# EAGLE board Thetis_RevF3_PCB (EAGLE 9.7.0)
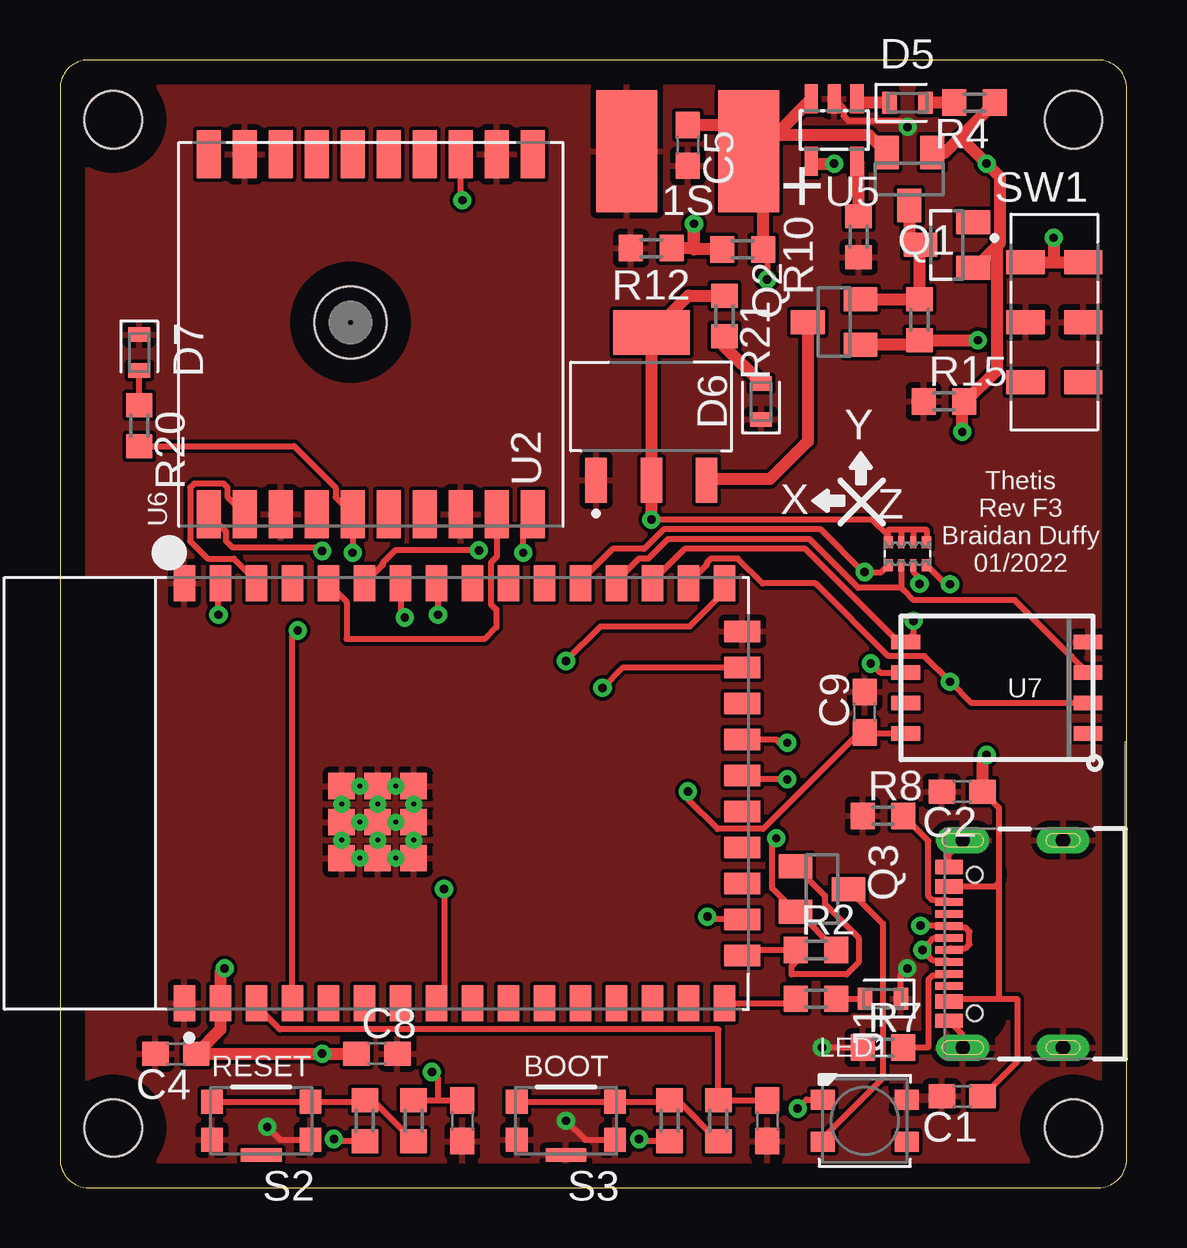
[diagram p0: board, top side]
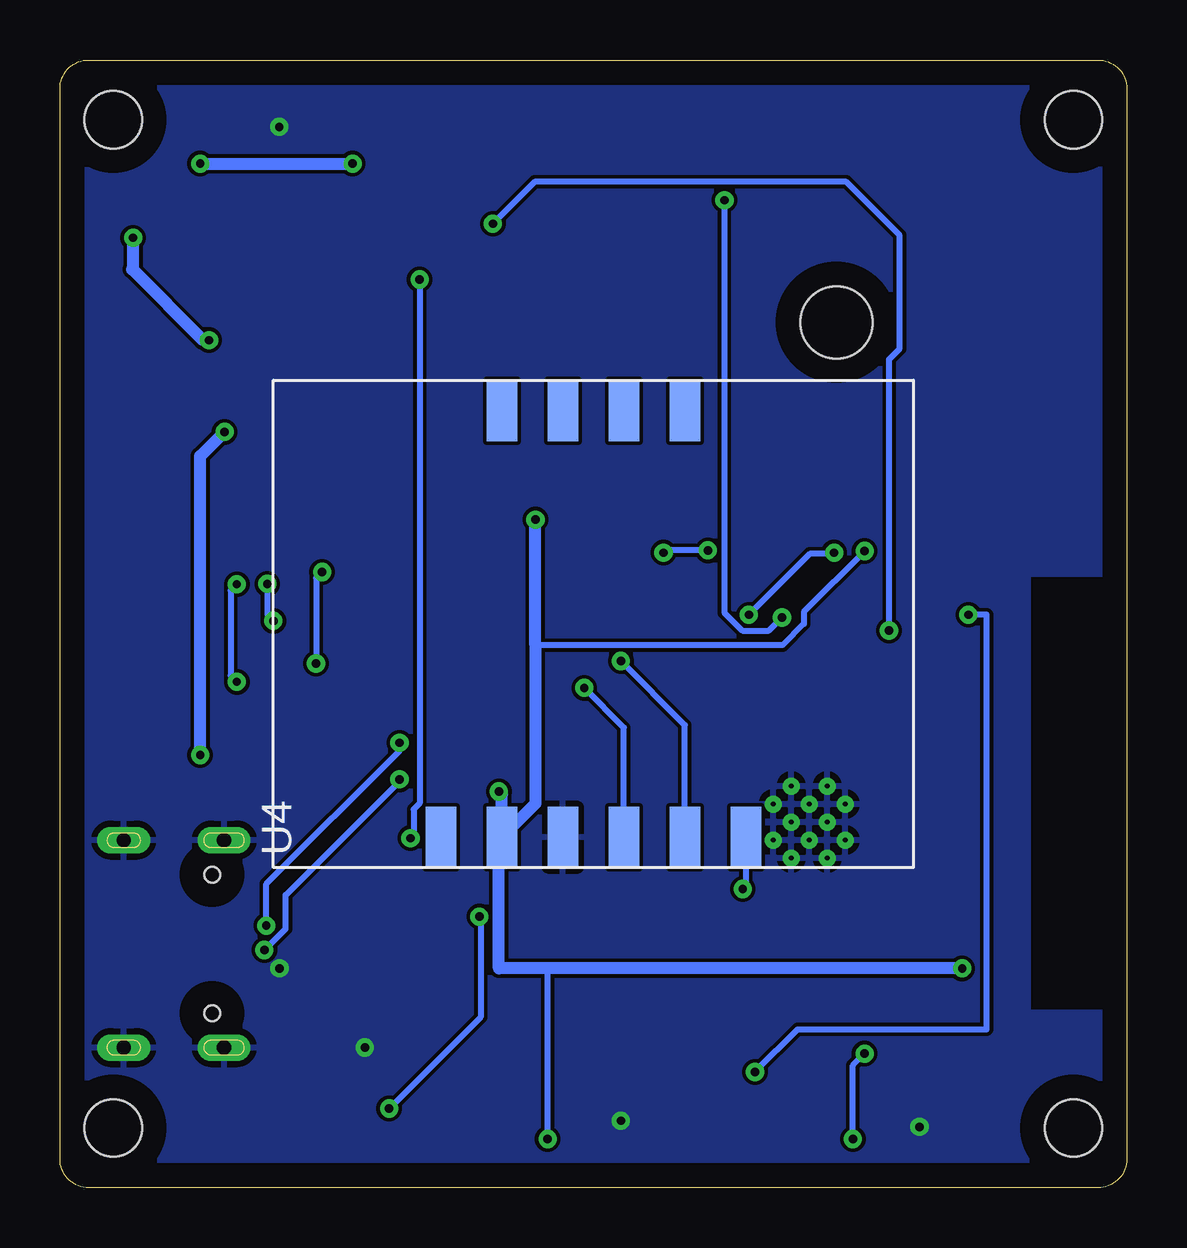
[diagram p1: board, bottom side, seen from below]

Size 44.45 x 46.99 mm. Coordinates in mm from the lower left corner, seen from the top.
Outline: 44.45,1.19 44.45,45.8 arc90 43.26,46.99 1.19,46.99 arc90 0,45.8 0,1.19 arc90 1.19,0 43.26,0 arc90 44.45,1.19
Copper layers (1*16): Top 0.035mm / dielectric 1.5mm / Bottom 0.035mm
Design rules "default": minimum track width 6mil, minimum drill 0.35mm, track to track 6mil, track to pad 6mil, pad to pad 6mil, via to via 6mil, smd to smd 6mil, copper to edge 40mil, drill to drill 6mil, minimum pad ring 10mil, minimum via ring 8mil, stop-mask expansion 4mil, vias tented up to drill 0mil, thermal gap 10mil
Net classes: 0 default: width 0.178 mm; 2 lowpower: width 0.305 mm, drill 0.483 mm
Holes 2.39 mm at 2.22,2.49 2.22,44.5 42.23,44.5 42.23,2.49
tKeepout: area -0.2,42.1 to 4.6,46.9; area 39.8,42.1 to 44.6,46.9; area 39.8,0.1 to 44.6,4.9; area -0.2,0.1 to 4.6,4.9
bKeepout: area 39.8,42.1 to 44.6,46.9; area -0.2,42.1 to 4.6,46.9; area 39.8,0.1 to 44.6,4.9; area -0.2,0.1 to 4.6,4.9

## Footprints (pad centres in the part's own frame; a part is rotated, then mirrored left to right if it is on the bottom)
C0603 = smd 1.1 x 1: 1 -0.85,0; 2 0.85,0
SOT23 = smd 1 x 1.4: 1 -0.95,-1.1; 2 0.95,-1.1; 3 0,1.1
LEDC1608X65N = smd 0.612 x 0.912: A 0.75,0; C -0.75,0
LEDC1608X35N = smd 0.612 x 0.912: A 0.75,0; C -0.75,0
GCT_USB4105-GF-A = smd 0.6 x 1.15: A1_B12 -3.2,4.755; A4_B9 -2.4,4.755; B1_A12 3.2,4.755; B4_A9 2.4,4.755 | smd 0.3 x 1.15: A5 -1.25,4.755; A6 -0.25,4.755; A7 0.25,4.755; A8 1.25,4.755; B5 1.75,4.755; B6 0.75,4.755; B7 -0.75,4.755; B8 -1.75,4.755 | drill 0.6 pad 1.05 long: S1 -4.32,4.18; S4 4.32,4.18 | drill 0.6 pad 1 long: S2 -4.32,0; S3 4.32,0 | hole 0.65: 2.89,3.68; -2.89,3.68
LED3535 = smd 1 x 0.85: 1 -1.75,0.875; 2 -1.75,-0.875; 3 1.75,-0.875; 4 1.75,0.875
SMD2,54-5,08 = smd 2.54 x 5.08: 1 0,0
R0603 = smd 1 x 1.1: 1 -0.85,0; 2 0.85,0
EXBN8V = smd 0.38 x 0.5: 1 -0.8,-0.475; 4 0.8,-0.475; 5 0.8,0.475; 8 -0.8,0.475 | smd 0.25 x 0.5: 2 -0.25,-0.475; 3 0.25,-0.475; 6 0.25,0.475; 7 -0.25,0.475
SW_KMR221GLFS = smd 0.9 x 1: 1 -2.05,0.8; 2 -2.05,-0.8; 3 2.05,-0.8; 4 2.05,0.8 | smd 1.7 x 0.55: 5 0,1.425
SW_JS202011JCQN = smd 1.6 x 1: 1 -1.2,2.5; 2 -1.2,0; 3 -1.2,-2.5; 4 1.2,2.5; 5 1.2,0; 6 1.2,-2.5
SOT230P700X180-4N = smd 1.86 x 0.9: 1 -3.075,2.3; 2 -3.075,0; 3 -3.075,-2.3 | smd 1.86 x 3.19: 4 3.075,0
XCVR_ESP32-S2-WROOM = smd 1.5 x 0.9: 1 -8.75,8; 2 -8.75,6.5; 3 -8.75,5; 4 -8.75,3.5; 5 -8.75,2; 6 -8.75,0.5; 7 -8.75,-1; 8 -8.75,-2.5; 9 -8.75,-4; 10 -8.75,-5.5; 11 -8.75,-7; 12 -8.75,-8.5; 13 -8.75,-10; 14 -8.75,-11.5; 15 -8.75,-13; 16 -8.75,-14.5; 27 8.75,-14.5; 28 8.75,-13; 29 8.75,-11.5; 30 8.75,-10; 31 8.75,-8.5; 32 8.75,-7; 33 8.75,-5.5; 34 8.75,-4; 35 8.75,-2.5; 36 8.75,-1; 37 8.75,0.5; 38 8.75,2; 39 8.75,3.5; 40 8.75,5; 41 8.75,6.5; 42 8.75,8 | smd 0.9 x 1.5: 17 -6.75,-15.25; 18 -5.25,-15.25; 19 -3.75,-15.25; 20 -2.25,-15.25; 21 -0.75,-15.25; 22 0.75,-15.25; 23 2.25,-15.25; 24 3.75,-15.25; 25 5.25,-15.25; 26 6.75,-15.25 | smd 1.1 x 1.1: 43.1 -1.19,-0.05; 43.2 -2.69,-0.05; 43.3 0.31,-0.05; 43.4 -2.69,-1.55; 43.5 -1.19,-1.55; 43.6 0.31,-1.55; 43.7 -2.69,1.45; 43.8 -1.19,1.45; 43.9 0.31,1.45 | drill 0.2 pad 0.4: 43.10 -1.19,0.7; 43.11 -2.69,0.7; 43.12 0.31,0.7; 43.13 -2.69,-0.8; 43.14 -1.19,-0.8; 43.15 0.31,-0.8; 43.16 -1.94,1.45; 43.17 -0.44,1.45; 43.18 -1.94,-0.05; 43.19 -0.44,-0.05; 43.20 -1.94,-1.55; 43.21 -0.44,-1.55
ADAFRUIT-BNO055-BREAKOUT-SMD = smd 2.54 x 1.27: P$1 -8.89,6.35; P$2 -8.89,3.81; P$3 -8.89,1.27; P$4 -8.89,-1.27; P$5 -8.89,-3.81; P$6 -8.89,-6.35; P$7 8.89,3.81; P$8 8.89,1.27; P$9 8.89,-1.27; P$10 8.89,-3.81
SOT23-5L = smd 0.55 x 1.2: 1 -0.95,-1.3; 2 0,-1.3; 3 0.95,-1.3; 4 0.95,1.3; 5 -0.95,1.3
FGPMMOPA6H = smd 2 x 1: P$1 -7.5,6.75; P$2 -7.5,5.25; P$3 -7.5,3.75; P$4 -7.5,2.25; P$5 -7.5,0.75; P$6 -7.5,-0.75; P$7 -7.5,-2.25; P$8 -7.5,-3.75; P$9 -7.5,-5.25; P$10 -7.5,-6.75; P$11 7.5,-6.75; P$12 7.5,-5.25; P$13 7.5,-3.75; P$14 7.5,-2.25; P$15 7.5,-0.75; P$16 7.5,0.75; P$17 7.5,2.25; P$18 7.5,3.75; P$19 7.5,5.25; P$20 7.5,6.75 | hole 3: 0.5,0.85
LGA8_8X6 = smd 1.2 x 0.6: 1 -3.8,1.905; 2 -3.8,0.635; 3 -3.8,-0.635; 4 -3.8,-1.905; 5 3.8,-1.905; 6 3.8,-0.635; 7 3.8,0.635; 8 3.8,1.905

## Placement (x,y rotation side)
C1  10 uF  [C0603]  37.59,3.81 180 top
C2  10 uF  [C0603]  37.59,16.51 180 top
C3  1 uF  [C0603]  16.76,2.79 270 top
C4  1 uF  [C0603]  4.83,5.59 180 top
C5  10 uF  [C0603]  26.16,43.43 270 top
C6  1 uF  [C0603]  29.46,2.79 270 top
C8  1 uF  [C0603]  13.21,5.59 0 top
C9  1 uF  [C0603]  33.53,19.81 90 top
D4  BAT400  [SOT23]  36.95,39.28 90 top
D5  ORG  [LEDC1608X65N]  35.31,45.21 0 top
D6  RED  [LEDC1608X65N]  29.21,32.77 90 top
D7  RED  [LEDC1608X35N]  3.3,34.8 270 top
D8  BLU  [LEDC1608X65N]  34.29,7.87 180 top
J1  USB4105-GF-A  [GCT_USB4105-GF-A]  41.79,10.16 90 top
LED1  WS2812B3535  [LED3535]  33.53,2.79 0 top
PAD1  Batt+  [SMD2,54-5,08]  28.7,43.18 0 top
PAD2  Batt-  [SMD2,54-5,08]  23.62,43.18 0 top
Q1  DMG3415U-7  [SOT23]  35.39,42.03 180 top
Q2  DMG3415U-7  [SOT23]  32.26,36.07 90 top
Q3  DMG3415U-7  [SOT23]  31.75,12.45 270 top
R1  10k  [R0603]  25.4,2.79 270 top
R2  1k  [R0603]  31.5,9.91 0 top
R3  10k  [R0603]  27.43,2.79 90 top
R4  1k  [R0603]  38.1,45.21 180 top
R5  2k  [R0603]  33.27,39.62 270 top
R6  10k  [R0603]  14.73,2.79 90 top
R7  5k4  [R0603]  34.29,5.84 0 top
R8  5k4  [R0603]  34.29,15.49 0 top
R10  1M  [R0603]  28.45,39.1 0 top
R12  1M  [R0603]  24.64,39.15 0 top
R13  10k  [R0603]  12.7,2.79 270 top
R14  1k  [R0603]  31.5,7.87 0 top
R15  100k  [R0603]  36.83,32.77 0 top
R16  100k  [R0603]  35.81,36.16 90 top
R20  1k  [R0603]  3.3,31.75 270 top
R21  1k  [R0603]  27.69,36.32 270 top
RN1  10k  [EXBN8V]  35.31,26.42 180 top
S2  KMR221GLFS  [SW_KMR221GLFS]  8.38,2.79 180 top
S3  KMR221GLFS  [SW_KMR221GLFS]  21.08,2.79 180 top
SW1  JS202011JCQN  [SW_JS202011JCQN]  41.43,36.07 0 top
U2  AZ1117H-3.3TRE1  [SOT230P700X180-4N]  24.64,32.55 90 top
U3  ESP32-S2-WROOM  [XCVR_ESP32-S2-WROOM]  13.18,16.43 90 top
U4  BNO055 Breakout  [ADAFRUIT-BNO055-BREAKOUT-SMD]  22.23,23.5 90 bottom
U5  MCP73831/OT  [SOT23-5L]  32.26,44.07 180 top
U6  [FGPMMOPA6H]  12.95,35.56 90 top
U7  XTSD  [LGA8_8X6]  39.03,20.83 180 top

## Library data of the parts
C1-C6 C8 C9 = rcl; SPICEPREFIX: C
D4 = diode
D5 D6 D8 = LED; CATEGORY: LED; COLOR: GREEN; DESCRIPTION: CHIP LED ROUND; SUB-CATEGORY: CHIP; TYPE: ROUND_TOP
D7 = LED; CATEGORY: LED; COLOR: YELLOW; DESCRIPTION: CHIP LED FLAT; SUB-CATEGORY: CHIP; TYPE: FLAT_TOP
J1 = USB4105-GF-A; AVAILABILITY: In Stock; DESCRIPTION: USB-C (USB TYPE-C) USB 2.0 Receptacle Connector 24 (16+8 Dummy) Position Surface Mount, Right Angle; Through Hole; MF: GCT; MP: USB4105-GF-A; PACKAGE: None; PRICE: None; PURCHASE-URL: https://pricing.snapeda.com/search/part/USB4105-GF-A/?ref=eda
LED1 = adafruit
PAD1 PAD2 = wirepad
Q1-Q3 = Transistor; CATEGORY: Transistor; DESCRIPTION: MOSFET P-CH 50V 130MA SOT-23; DRAIN_CURRENT: 130mA; MANUFACTURER: ON Semiconductor; MPN: BSS84; OPERATING_TEMP: -55°C ~ 150°C; PART_STATUS: Active; ROHS_COMPLIANT: Yes; SUB-CATEGORY: MOSFET; THERMALLOSS: 360mW; TYPE: P-Channel
R1-R8 R10 R12-R16 R20 R21 = rcl; SPICEPREFIX: R
RN1 = resistor-dil-Poseidon-Edit; OC_FARNELL: unknown; OC_NEWARK: unknown
S2 S3 = KMR221GLFS; MANUFACTURER: CnK
SW1 = UTL-Lib
U2 = AZ1117EH-5.0TRG1; ARROW_ELECTRONICS-PURCHASE-URL: https://snapeda.com/shop?store=Arrow+Electronics&id=482930; AVAILABILITY: Good; DESCRIPTION: Linear Voltage Regulator IC 1 Output 1A SOT-223; DIGIKEY-PURCHASE-URL: https://snapeda.com/shop?store=DigiKey&id=482930; MF: Diodes Inc.; MOUSER-PURCHASE-URL: https://snapeda.com/shop?store=Mouser&id=482930; MP: AZ1117EH-5.0TRG1; PACKAGE: SOT-223 Diodes Inc.; PRICE: None
U3 = ESP32-S2-WROOM; MANUFACTURER: Espressif Systems; MAXIMUM_PACKAGE_HEIGHT: 3.45mm; PARTREV: V1.0; STANDARD: Manufacturer Recommendations
U4 = EVE-ECAD-Library
U5 U6 = adafruit - EVE Edit
U7 = microbuilder

## Nets
3.3V: C4.1 C8.1 C9.1 R1.2 R13.2 R21.1 RN1.1 RN1.2 RN1.3 RN1.4 U2.2 U2.4 U3.2 U4.P$2 U6.P$1 U7.8
!GPS_RST: U3.40 U6.P$2
!IMU_RST: U3.8 U4.P$6
!NEO_EN: Q3.1 R2.1 U3.17
!RST: C3.1 R6.2 U3.41
ACT_LED: R14.1 U3.16
BATT_MON: R10.1 R12.2 U3.4
BOOT: C6.1 R3.2 U3.3
CC1: J1.A5 R7.2
CC2: J1.B5 R8.2
ESP_RX0: U3.38 U6.P$9
ESP_TX0: U3.37 U6.P$10
GND: C1.2 C2.2 C3.2 C4.2 C5.2 C6.2 C8.2 C9.2 D6.C D7.C D8.C J1.A1_B12 J1.B1_A12 J1.S1 J1.S2 J1.S3 J1.S4 LED1.4 PAD2.1 R5.2 R7.1 R8.1 R12.1 R15.1 S2.1 S2.4 S3.1 S3.4 S3.5 SW1.2 SW1.5 U2.1 U3.1 U3.26 U3.42 U3.43.1 U3.43.2 U3.43.3 U3.43.4 U3.43.5 U3.43.6 U3.43.7 U3.43.8 U3.43.9 U3.43.10 U3.43.11 U3.43.12 U3.43.13 U3.43.14 U3.43.15 U3.43.16 U3.43.17 U3.43.18 U3.43.19 U3.43.20 U3.43.21 U4.P$3 U5.2 U6.P$3 U6.P$8 U6.P$12 U6.P$19 U7.4
GPS_FIX: R20.2 U3.35 U6.P$5
GPS_PPS: U3.36 U6.P$13
MISO: RN1.5 U3.31 U7.6
MOSI: RN1.7 U3.29 U7.5
N$1: Q2.1 R16.1 SW1.1 SW1.4
N$2: D7.A R20.1
N$3: D8.A R14.2
N$4: R6.1 R13.1 S2.2 S2.3
N$5: LED1.2 Q3.3
N$6: Q2.3 U2.3
N$7: R1.1 R3.1 S3.2 S3.3
N$13: D4.3 Q1.3 Q2.2 R16.2
N$20: D5.A R4.2
N$21: D5.C U5.1
N$22: R5.1 U5.5
N$24: D6.A R21.2
NEO_DATA: LED1.1 U3.18
SCK: RN1.6 U3.30 U7.3
SCL: U3.27 U4.P$5
SD_CS: RN1.8 U3.28 U7.2
SDA: U3.25 U4.P$4
USB_DN: J1.A7 J1.B7 U3.22
USB_DP: J1.A6 J1.B6 U3.23
V_BATT: C5.1 PAD1.1 Q1.2 Q3.2 R2.2 R10.2 U5.3
V_USB: C1.1 C2.1 D4.1 J1.A4_B9 J1.B4_A9 Q1.1 R4.1 R15.2 U5.4
VCC: U4.P$1

## Tracks (layer width: path | path; a pad name or v marks a point on that pad's centre or on a via)
3.3V  (via drill 0.35)
  Top 0.254: U7.8 33.57,18.92 C9.1 33.31,18.96 29.3,14.95 27.4,14.95 26.16,16.19 v26.16,16.51 | U6.P$1 6.92,27.34 6.92,26.94 7.2,26.67 10.78,26.67 v10.92,26.53 | RN1.4 34.51,27.18 | 34.51,27.18 34.51,27.39 34.54,27.43 35.05,27.43 | 35.05,27.43 35.06,27.43 RN1.3 | 35.05,27.43 35.56,27.43 | 35.56,27.43 RN1.2 | 35.56,27.43 36.07,27.43 36.11,27.39 RN1.1 | 34.51,27.18 33.84,27.84 v24.64,27.84 | R13.2 11.5,1.94 v11.41,2.03 | R1.2 24.22,1.94 v24.13,2.03
  Top 0.508: R21.1 26.18,37.17 U2.4 U2.2 v24.64,27.84 | C8.1 v10.92,5.59 C4.1 6.68,6.6 U3.2 6.68,8.97 v6.86,9.14
  Bottom 0.254: v10.92,26.53 13.45,24 13.45,23.49 14.34,22.61 24.64,22.61 | v11.41,2.03 11.41,5.1 v10.92,5.59 | v24.13,2.03 24.13,9.14
  Bottom 0.508: v6.86,9.14 24.13,9.14 26.16,9.14 26.16,14.48 U4.P$2 | v24.64,27.84 24.64,22.61 24.64,16 U4.P$2 | U4.P$2 26.04,16.38 v26.16,16.51
!GPS_RST
  Top 0.254: U6.P$2 6.98,28.78 6.98,29.18 6.82,29.34 5.59,29.34 5.42,29.18 5.42,26.94 6.16,26.21 7.25,26.21 8.18,25.27 U3.40
!IMU_RST  (via drill 0.35)
  Top 0.254: v16,12.45 16,8 U3.8
  Bottom 0.254: U4.P$6 15.88,12.57 v16,12.45
!NEO_EN
  Top 0.254: Q3.1 31.87,12.18 31.87,11.83 33.27,10.43 33.27,9.39 32.77,8.89 30.48,8.89 30.48,9.23 30.65,9.4 R2.1 28.66,9.91 U3.17
!RST  (via drill 0.35)
  Top 0.254: R6.2 15.75,3.64 | 15.75,3.64 C3.1 | v15.49,4.83 15.75,4.57 15.75,3.64 | v6.6,23.88 6.6,25.1 U3.41
  Bottom 0.254: v15.49,4.83 13.72,6.6 5.84,6.6 5.84,23.88 v6.6,23.88
ACT_LED
  Top 0.254: U3.16 30.45,7.68 R14.1
BATT_MON  (via drill 0.35)
  Top 0.254: U3.4 9.68,23 v9.91,23.22
  Top 0.508: R12.2 26.42,39.15 v26.42,40.17 26.42,39.1 R10.1
  Bottom 0.254: v26.42,40.17 24.67,41.91 11.68,41.91 9.46,39.69 9.46,34.97 9.91,34.52 v9.91,23.22
BOOT
  Top 0.254: U3.3 8.18,7.58 9.16,6.6 27.43,6.6 R3.2 C6.1
CC1
  Top 0.254: J1.A5 36.97,8.84 36.35,8.84 36.18,8.68 36.18,5.87 36.16,5.84 R7.2
CC2
  Top 0.254: J1.B5 36.97,11.98 36.35,11.98 36.18,12.14 36.18,14.45 R8.2
ESP_RX0
  Top 0.254: U3.38 11.94,24.43 11.94,22.86 17.69,22.86 18.18,23.35 18.18,24.08 17.95,24.31 17.95,26.05 18.2,26.3 U6.P$9
ESP_TX0  (via drill 0.35)
  Top 0.254: U3.37 13.45,25.95 13.45,26.05 13.97,26.56 v17.45,26.56 | v19.3,26.46 19.3,27.66 U6.P$10
  Bottom 0.254: v17.45,26.56 19.16,26.56 19.26,26.46 v19.3,26.46
GND  (via drill 0.35)
  Top 0.254: U3.43.10 U3.43.1 U3.43.19 | J1.B1_A12 37.04,13.9 J1.S4 | J1.A1_B12 37.61,6.38 J1.S1 | 32.26,45.6 U5.2 32.65,44.98 32.65,44.66 32.86,44.45 35.05,44.45 35.3,44.21 v35.32,44.21 | v8.64,2.54 9.18,1.99 S2.1 | S3.1 21.88,1.99 v21.08,2.79 | R7.1 v31.75,5.84 | D8.C 35.04,8.88 v35.31,9.14
  pour Top: -1.4,-1.14 46.86,-1.14 46.86,47.88 -1.4,47.88
  pour Bottom: -1.4,-1.14 46.86,-1.14 46.86,47.88 -1.4,47.88
GPS_FIX  (via drill 0.35)
  Top 0.254: R20.2 9.76,30.9 11.48,29.18 11.48,28.78 U6.P$5 12.19,28.05 v12.19,26.46 | U3.35 15.75,25.11 v15.75,23.88
  Bottom 0.254: v15.75,23.88 13.21,26.42 12.24,26.42 v12.19,26.46
GPS_PPS  (via drill 0.35)
  Top 0.254: U3.36 14.22,25.14 14.22,23.9 v14.37,23.76 | v16.76,41.15 16.7,41.15 U6.P$13
  Bottom 0.254: v16.76,41.15 16.76,23.96 16.02,23.22 14.91,23.22 v14.37,23.76
MISO  (via drill 0.35)
  Top 0.254: U3.31 21.69,25.18 21.69,25.28 23.02,26.61 24.34,26.61 25.16,27.43 31.69,27.43 33.46,25.65 v33.53,25.65 34.22,25.65 RN1.5 | v33.78,21.84 34.13,21.49 34.14,21.49 34.17,21.46 U7.6
  Bottom 0.254: v33.53,25.65 33.78,25.4 v33.78,21.84
MOSI  (via drill 0.35)
  Top 0.254: U3.29 24.68,25.27 26.02,26.61 31.06,26.61 34.94,22.73 U7.5 35.56,23.06 v35.56,23.62 | v35.81,25.16 35.81,25.4 35.56,25.66 RN1.7
  Bottom 0.254: v35.81,25.16 35.81,23.88 v35.56,23.62
N$1  (via drill 0.35)
  Top 0.508: Q2.1 35.62,35.12 R16.1 v38.24,35.31 | SW1.1 41.4,38.57 | v41.4,39.58 41.4,38.57 | 41.4,38.57 SW1.4
  Bottom 0.508: v41.4,39.58 41.4,38.31 41.45,38.27 38.5,35.31 v38.24,35.31
N$2
  Top 0.254: R20.1 D7.A
N$3
  Top 0.254: R14.2 D8.A
N$4
  Top 0.254: S2.3 S2.2 12.65,3.59 R13.1 13.03,3.64 R6.1
N$5
  Top 0.254: Q3.3 34.29,11.01 34.29,4.57 31.78,2.06 LED1.2
N$6
  Top 0.508: U2.3 26.98,29.53 29.58,29.53 31.16,31.1 Q2.3
N$7
  Top 0.254: S3.3 S3.2 25.35,3.59 R1.1 25.73,3.64 R3.1
N$13
  Top 0.508: Q1.3 35.39,39.74 D4.3 35.81,39.24 R16.2 Q2.2
N$20
  Top 0.508: R4.2 D5.A
N$21
  Top 0.508: D5.C 33.37,45.21 U5.1
N$22
  Top 0.508: R5.1 33.27,42.71 U5.5
N$24
  Top 0.508: D6.A 27.69,35.04 R21.2
NEO_DATA  (via drill 0.35)
  Top 0.254: U3.18 27.09,11.18 v26.98,11.29 | v30.73,3.3 31.1,3.67 LED1.1
  Bottom 0.254: v30.73,3.3 26.92,7.11 26.92,11.24 v26.98,11.29
SCK
  Top 0.254: U7.3 42.14,22.15 42.12,22.15 39.78,24.49 35.56,24.49 35.16,24.89 35.05,25 | U3.30 23.18,25.27 24.12,26.21 24.51,26.21 25.32,27.02 31.23,27.02 33.26,25 35.05,25 | RN1.6 35.06,25 35.05,25
SCL  (via drill 0.35)
  Top 0.254: U3.27 27.68,24.83 26.24,23.39 22.52,23.39 v21.08,21.95
  Bottom 0.254: U4.P$5 18.41,19.28 v21.08,21.95
SD_CS  (via drill 0.35)
  Top 0.254: U3.28 26.95,25.95 26.95,26.05 27.12,26.21 28.25,26.21 29.28,25.18 31.49,25.18 34.52,22.15 36.01,22.15 v37.08,21.08 37.97,20.19 U7.2 | RN1.8 36.9,25.15 v37.08,25.15
  Bottom 0.254: v37.08,25.15 37.34,24.89 37.34,21.34 v37.08,21.08
SDA  (via drill 0.35)
  Top 0.254: v22.61,20.83 23.46,21.68 U3.25
  Bottom 0.254: U4.P$4 20.95,19.18 v22.61,20.83
USB_DN  (via drill 0.35)
  Top 0.254: U3.22 28.59,17.02 v30.3,17.02 | 36.18,9.91 36.18,10.18 36.4,10.39 37.02,10.39 J1.A7 | 36.18,9.91 36.18,9.64 36.35,9.48 36.97,9.48 J1.B7 | 36.18,9.91 v35.93,9.91
  Bottom 0.254: v35.93,9.91 35.05,10.79 35.05,12.19 30.3,16.94 v30.3,17.02
USB_DP  (via drill 0.35)
  Top 0.254: v35.85,10.92 35.87,10.91 J1.B6 37.11,10.84 37.73,10.84 37.89,10.68 37.89,10.14 37.73,9.98 37.11,9.98 J1.A6 | U3.23 29.83,18.68 29.97,18.54 v30.3,18.54
  Bottom 0.254: v35.85,10.92 35.85,12.66 30.3,18.21 v30.3,18.54
V_BATT  (via drill 0.35)
  Top 0.254: R10.2 29.46,38.93 v29.46,37.85 | R2.2 30.76,11.5 Q3.2 29.67,12.47 29.67,14.39 v29.84,14.56
  Top 0.508: C5.1 27.6,44.28 PAD1.1 | U5.3 29.8,43.86 | 29.8,43.86 29.11,43.18 PAD1.1 | R10.2 29.3,42.58 PAD1.1 | Q1.2 33.71,43.86 29.8,43.86
  Bottom 0.254: v29.46,37.85 29.46,16.02 29.71,15.77 29.71,14.69 v29.84,14.56
V_USB  (via drill 0.35)
  Top 0.254: J1.A4_B9 37.15,7.87 39.12,7.87 | 39.12,7.87 39.88,7.87 39.88,5.25 C1.1 | J1.B4_A9 38.98,12.56 39.12,12.7 | 39.12,12.7 39.12,15.84 C2.1 | 39.12,12.7 39.12,7.87
  Top 0.508: Q1.1 36.87,43.13 37.51,43.77 | 37.51,43.77 R4.1 | U5.4 31.41,42.67 v32.26,42.67 | D4.1 38.18,38.46 38.25,38.46 39.03,39.24 | 37.51,43.77 v38.61,42.67 39.16,42.12 39.16,39.56 39.16,39.37 39.03,39.24 | 37.74,32.77 R15.2 | C2.1 38.44,17.87 v38.61,18.03 | v37.59,31.5 37.59,32.61 37.74,32.77 | 37.74,32.77 39.03,34.05 39.03,39.24
  Bottom 0.508: v38.61,42.67 v32.26,42.67 | v38.61,18.03 38.61,30.48 v37.59,31.5

## Text on the board
tSilk: 1S | + | Y | Z | X | Thetis / Rev F3 / Braidan Duffy / 01/2022 | RESET | BOOT